# Altium PCB Blade-Side PCB.PcbDoc
Units mil, origin at the board's own origin, x right, y up, seen from the top; angles counter-clockwise.
Board outline 734.25 x 734.25 mil, 4 copper layers (Top Layer, Mid Layer 1, Mid Layer 2, Bottom Layer), stack 61.811 mil thick; 4 components, 4 nets, 6 pads, 47 vias.
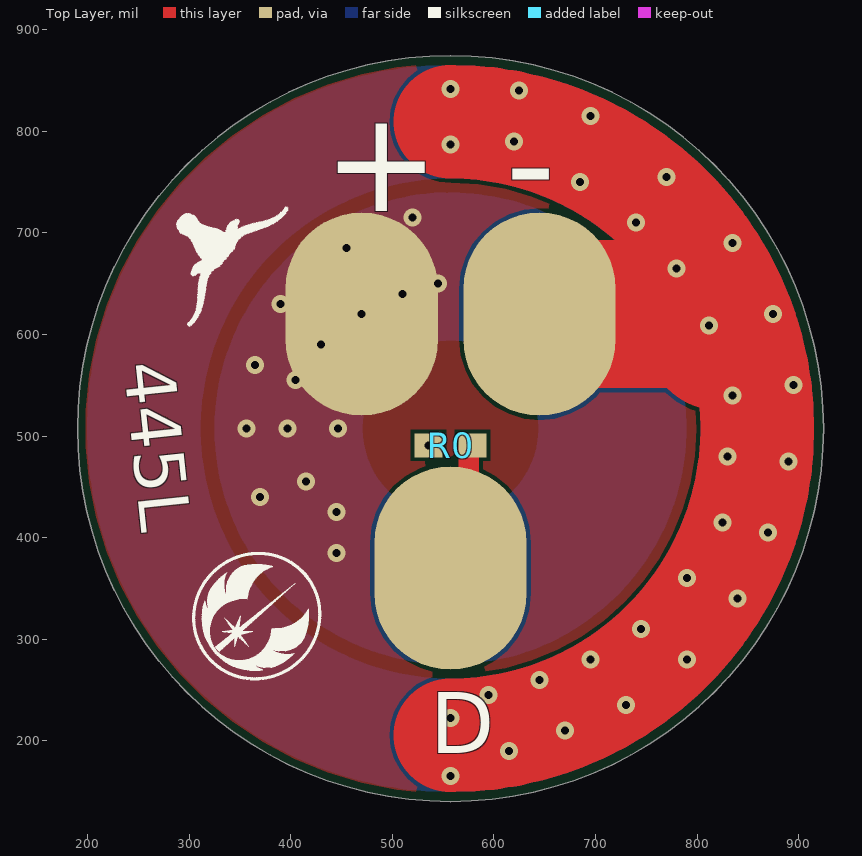
[diagram p0: Top Layer view]
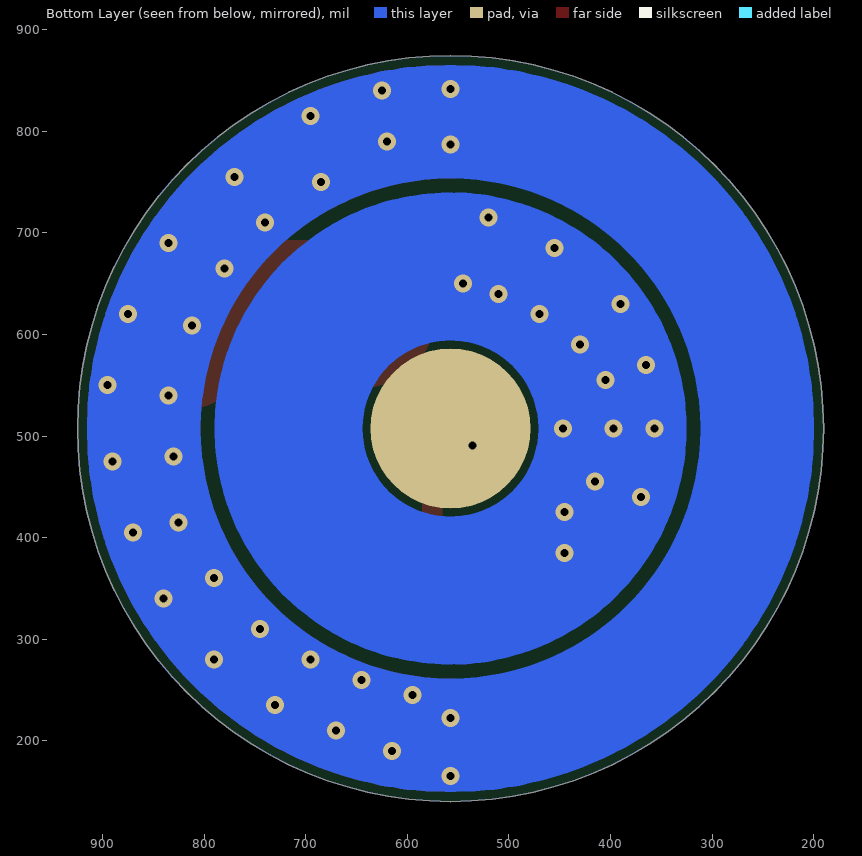
[diagram p1: Bottom Layer view, seen from below]
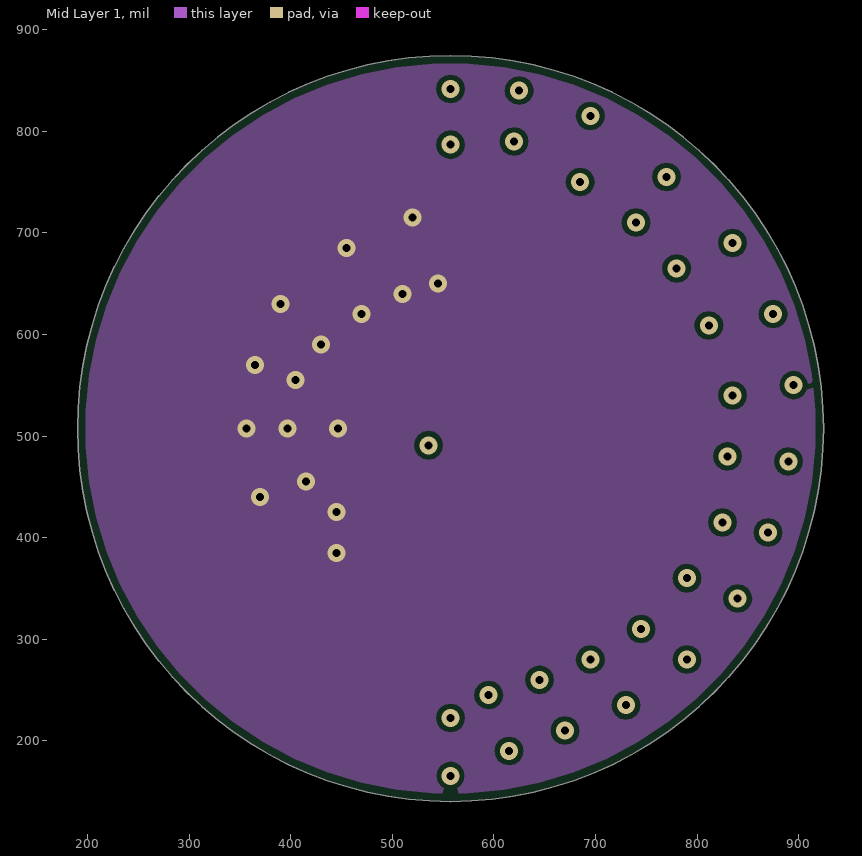
[diagram p2: Mid Layer 1]
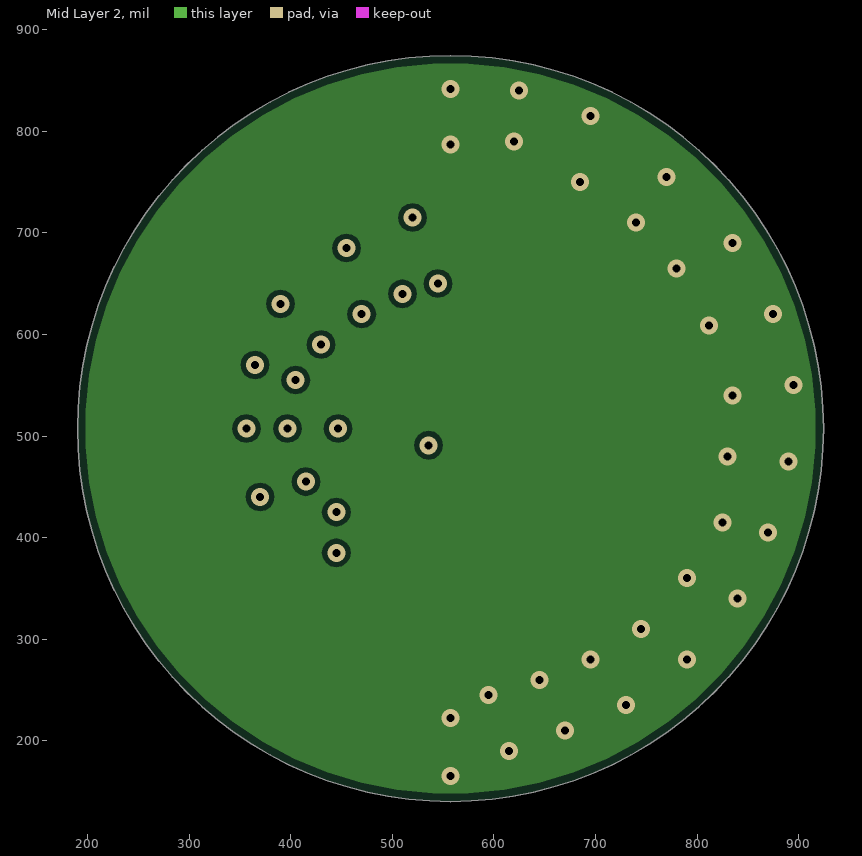
[diagram p3: Mid Layer 2]

## Layer stack, top to bottom
Top Solder: solder mask 0.5, Solder Resist, Dk 3.8
Top Layer: signal copper 1.378
Dielectric 1: prepreg 7.874, 7628, Dk 4.6
Mid Layer 1: signal copper 0.689
Core: core 41.9291, FR-4, Dk 4.5
Mid Layer 2: signal copper 0.689
Dielectric 2: prepreg 7.874, 7628, Dk 4.6
Bottom Layer: signal copper 1.378
Bottom Solder: solder mask 0.5, Solder Resist, Dk 3.8

## Board outline
190.25,507.38 ccw(c557.38,507.38) 557.38,140.25 ccw(c557.38,507.38) 924.5,507.38 ccw(c557.38,507.38) 557.38,874.5 ccw(c557.38,507.38)

## Design rules (kind name [scope] priority, off if disabled: settings)
BoardOutlineClearance [All] p1: gap=7.87 ignorepadtopadclearanceinfootprint=FALSE
Clearance [All] p1: gap=4 ignorepadtopadclearanceinfootprint=FALSE except(5: Arc-Via Track-Via SMDPad-Via THPad-Via Via-Via Via-Fill Via-Poly Via-Region Via-Text; 9.84: Arc-Hole Track-Hole SMDPad-Hole THPad-Hole Via-Hole Fill-Hole Poly-Hole Region-Hole Text-Hole)
ComponentClearance [All] p1: gap=4 collisioncheckmode=3 verticalgap=4 showdistances=TRUE
DiffPairsRouting [All] p1: maxlimit=4 minlimit=4 mostfreqgap=4 toplayer_minwidth=4 toplayer_maxwidth=71497.94 toplayer_prefwidth=4 midlayer1_minwidth=4 midlayer1_maxwidth=71497.94 midlayer1_prefwidth=4 midlayer2_minwidth=4 midlayer2_maxwidth=71497.94 midlayer2_prefwidth=4 bottomlayer_minwidth=4 bottomlayer_maxwidth=71497.94 bottomlayer_prefwidth=4 maxuncoupledlength=500
Height [All] p1: minheight=0 maxheight=71497.94 prefheight=500
HoleSize [All] p1: absolutevalues=TRUE maxlimit=248.03 minlimit=7.87 maxpercent=80.000 minpercent=20.000
HoleToHoleClearance [All] p1: gap=9.84 allowstackedmicrovias=FALSE
MinimumAnnularRing [All] p1: minimumring=3
MinimumSolderMaskSliver [All] p1: minsoldermaskwidth=0
PlaneClearance [All] p1: clearance=4
PlaneConnect PlaneConnectPowerPads [InPadClass('PowerPads')] p1: planeconnectstyle=Direct reliefexpansion=20 reliefentries=4 reliefconductorwidth=10 reliefairgap=10
PlaneConnect [All] p2: pad.planeconnectstyle=Relief pad.reliefexpansion=11.81 pad.reliefentries=4 pad.reliefconductorwidth=4 pad.reliefairgap=4 via.planeconnectstyle=Direct via.reliefexpansion=11.81 via.reliefentries=4 via.reliefconductorwidth=5 via.reliefairgap=5
PolygonConnect PolygonConnect_1 [All vs IsNamedPolygon('Top Layer-No Net')] p1: connectstyle=Direct reliefconductorwidth=10 reliefentries=4 polygonreliefangle="90 Angle" airgapwidth=10
PolygonConnect PolygonConnectPowerPads [All vs (InPadClass('PowerPads'))] p2: connectstyle=Direct reliefconductorwidth=10 reliefentries=4 polygonreliefangle="90 Angle" airgapwidth=10
PolygonConnect [All] p3: thpad.connectstyle=Relief thpad.reliefconductorwidth=4 thpad.reliefentries=4 thpad.polygonreliefangle="90 Angle" thpad.airgapwidth=4 smdpad.connectstyle=Relief smdpad.reliefconductorwidth=4 smdpad.reliefentries=4 smdpad.polygonreliefangle="90 Angle" smdpad.airgapwidth=4 via.connectstyle=Direct via.reliefconductorwidth=5 via.reliefentries=4 via.polygonreliefangle="90 Angle" via.airgapwidth=5
RoutingVias [All] p1: holewidth=7.87 width=17.72 viastyle="Through Hole" minholewidth=7.87 minwidth=17.72 maxholewidth=248.03 maxwidth=257.87
SilkToSilkClearance [All] p1: silktosilkclearance=0
SilkToSolderMaskClearance [IsPad] p1: minsilkscreentomaskgap=4 clearancetoexposedcopper=TRUE
SolderMaskExpansion [All] p1: expansion=2.95 istentingtop=FALSE
Width [All] p1: maxlimit=71497.94 minlimit=4 preferedwidth=4
20 further rules are at their usual default settings.

## Components (designator, comment, footprint, x,y, rotation, side; value= is the part's Value field where it differs from the comment)
+ "Wire Mount" "Wire Mount" 470,620 r0 top
- "Wire Mount" "Wire Mount" 645,620 r0 top
D "Wire Mount" "Wire Mount" 557.38,370 r0 top
R0 "470Ω, 0402" 0402 557.38,490.89 r180 top

## Footprints (in the part's own frame and the unit in brackets; to place one, negate y for a bottom-side part, rotate by r counter-clockwise, add the part's x,y. Pads: shape width x height; smd on the part's side, far side on the other; paste and mask are expansions set on the pad)
0402 [mm]
  rect 0.7x0.6 smd: 1(-0.55,0) 2(0.55,0)
  body extent -0.5,-0.25 0.5,0.25, height 0.35
"Wire Mount" [mil]
  oval 150x200 smd: 1(0,0)

## Part data
R0: library part "Resistor, 0402"

## Free pads (board coordinates)
  round 157.5 smd far side paste+0 mask+0: 11(557.38,507.38)

## Via types
v1: diameter 17.72, hole 7.87, Top Layer to Bottom Layer, 47 vias

## Nets (pads, with @x,y where several pads share a name; then routed paths per layer and width w, separated by ;. In a path a pad name is that pad's centre, name@x,y a point inside that pad or via, vN(x,y) a via of type N, cw(c..) or ccw(c..) an arc to the next point about the centre after c; other vN are vias at no path point)
DATA: pad.11 R0.2
  other v1: 535.72,490.89
GND: -.1 | length 3040.4
  Top Layer w112: 557.38,205.38 ccw(c557.38,507.38) 557.38,809.38
  Top Layer w145.75: -.1@646.96,626.39 645,624.43 -.1 800.47,620 822.71,597.76
  Bottom Layer w112: 859.38,507.38 ccw(c557.38,507.38) 859.38,507.38
  other v1: 557.38,165.54 615,190 670,210 557.38,222.52 730,235 595,245 645,260 695,280 790,280 745,310 840,340 790,360 870,405 825,415 890,475 830,480 835,540 895,550 811.59,608.88 875,620 780,665 835,690 740,710 685,750 770,755 557.38,786.71 620,790 695,815 625,840 557.38,841.59
NetD_1: D.1 R0.1 | length 131
  Top Layer w20: D.1 575.25,387.87 575.25,489.08 577.06,490.89 R0.1
VCC: +.1 | length 1002.2
  Bottom Layer w145.75: 716.88,507.38 ccw(c557.38,507.38) 716.88,507.38
  other v1: 445,385 445,425 370,440 415,455 356.46,507.38 396.9,507.38 446.75,507.38 405,555 365,570 430,590 470,620 390,630 510,640 545,650 455,685 520,715

## Polygon pours and split planes (outlines as drawn)
VCC on Top Layer "Top Layer-No Net" (solid, remove dead copper, pour order 0): 190.25,507.38 ccw(c557.38,507.38) 557.38,140.25 ccw(c557.38,507.38) 924.5,507.38 ccw(c557.38,507.38) 557.38,874.5 ccw(c557.38,507.38)
VCC on Mid Layer 1 "Top Layer-No Net1" (solid, remove dead copper, pour order 1): 190.25,507.38 ccw(c557.38,507.38) 557.38,140.25 ccw(c557.38,507.38) 924.5,507.38 ccw(c557.38,507.38) 557.38,874.5 ccw(c557.38,507.38)
GND on Mid Layer 2 "Top Layer-No Net2" (solid, remove dead copper, pour order 2): 190.25,507.38 ccw(c557.38,507.38) 557.38,140.25 ccw(c557.38,507.38) 924.5,507.38 ccw(c557.38,507.38) 557.38,874.5 ccw(c557.38,507.38)
GND on Bottom Layer "Top Layer-No Net3" (solid, remove dead copper, pour order 3): 190.25,507.38 ccw(c557.38,507.38) 557.38,140.25 ccw(c557.38,507.38) 924.5,507.38 ccw(c557.38,507.38) 557.38,874.5 ccw(c557.38,507.38)

## Silkscreen, mask and mechanical layers (free items; w line width, h text height)
Top Overlay:
  drawing of 3 lines, arcs and shapes, not listed
  text "445L" at 235.99,571.1 h50 r276
Mechanical 13:
  circle w0.5: c557.38,507.38 r0.2
  circle w0.5: c557.38,507.38 r78.74
  circle w0.5: c557.38,507.38 r86.61
  circle w0.5: c557.38,507.38 r256.89
  circle w0.5: c557.38,507.38 r367.13
  circle w0.5: c557.38,507.38 r364.17
  circle w0.5: c557.38,507.38 r232.28
  circle w0.5: c557.38,507.38 r240.16
  circle w0.5: c557.38,507.38 r256.89